# EAGLE board 2mos7 (EAGLE 5.10)
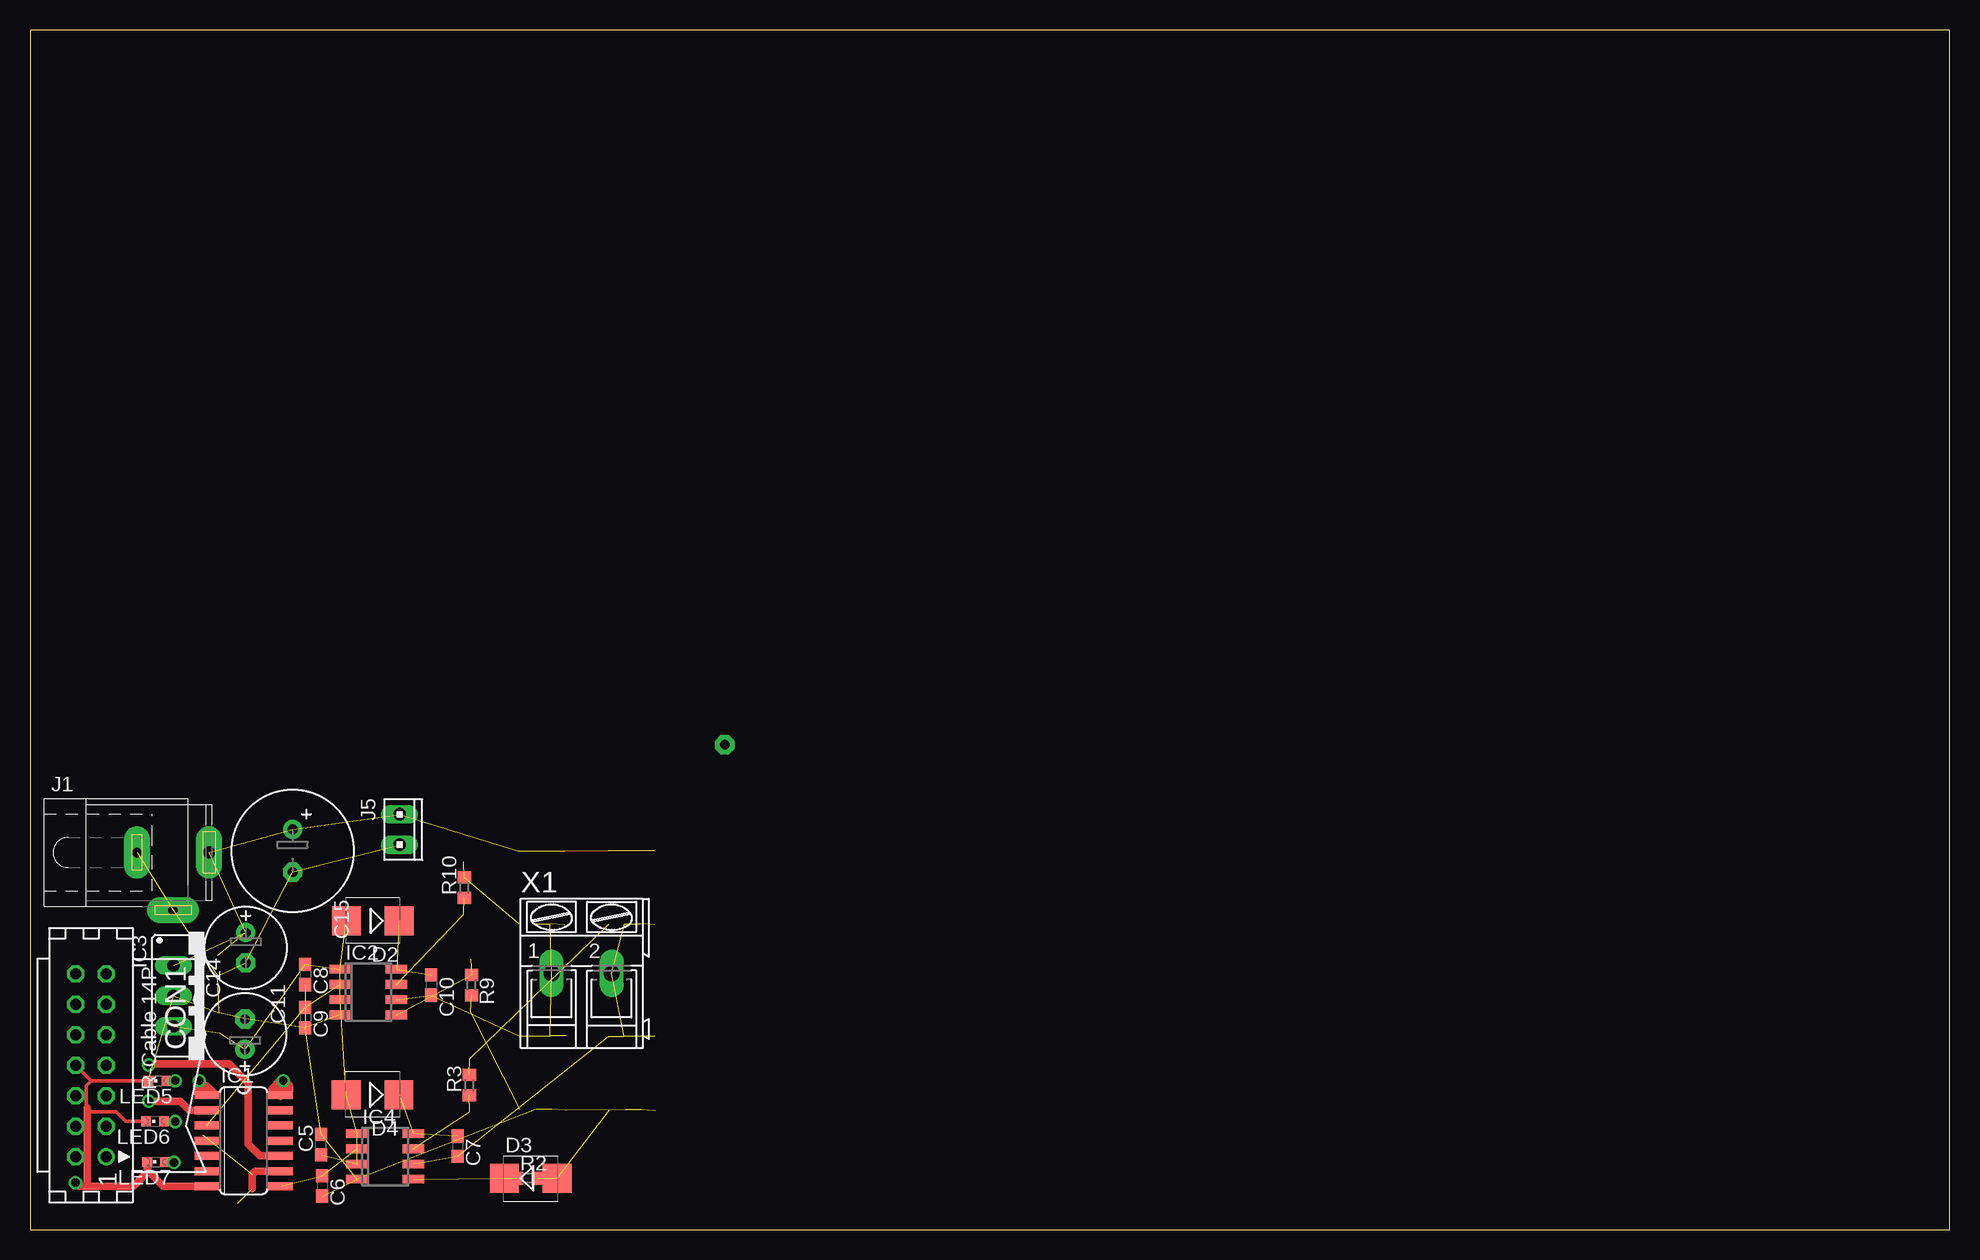
[diagram p0: board, top side]
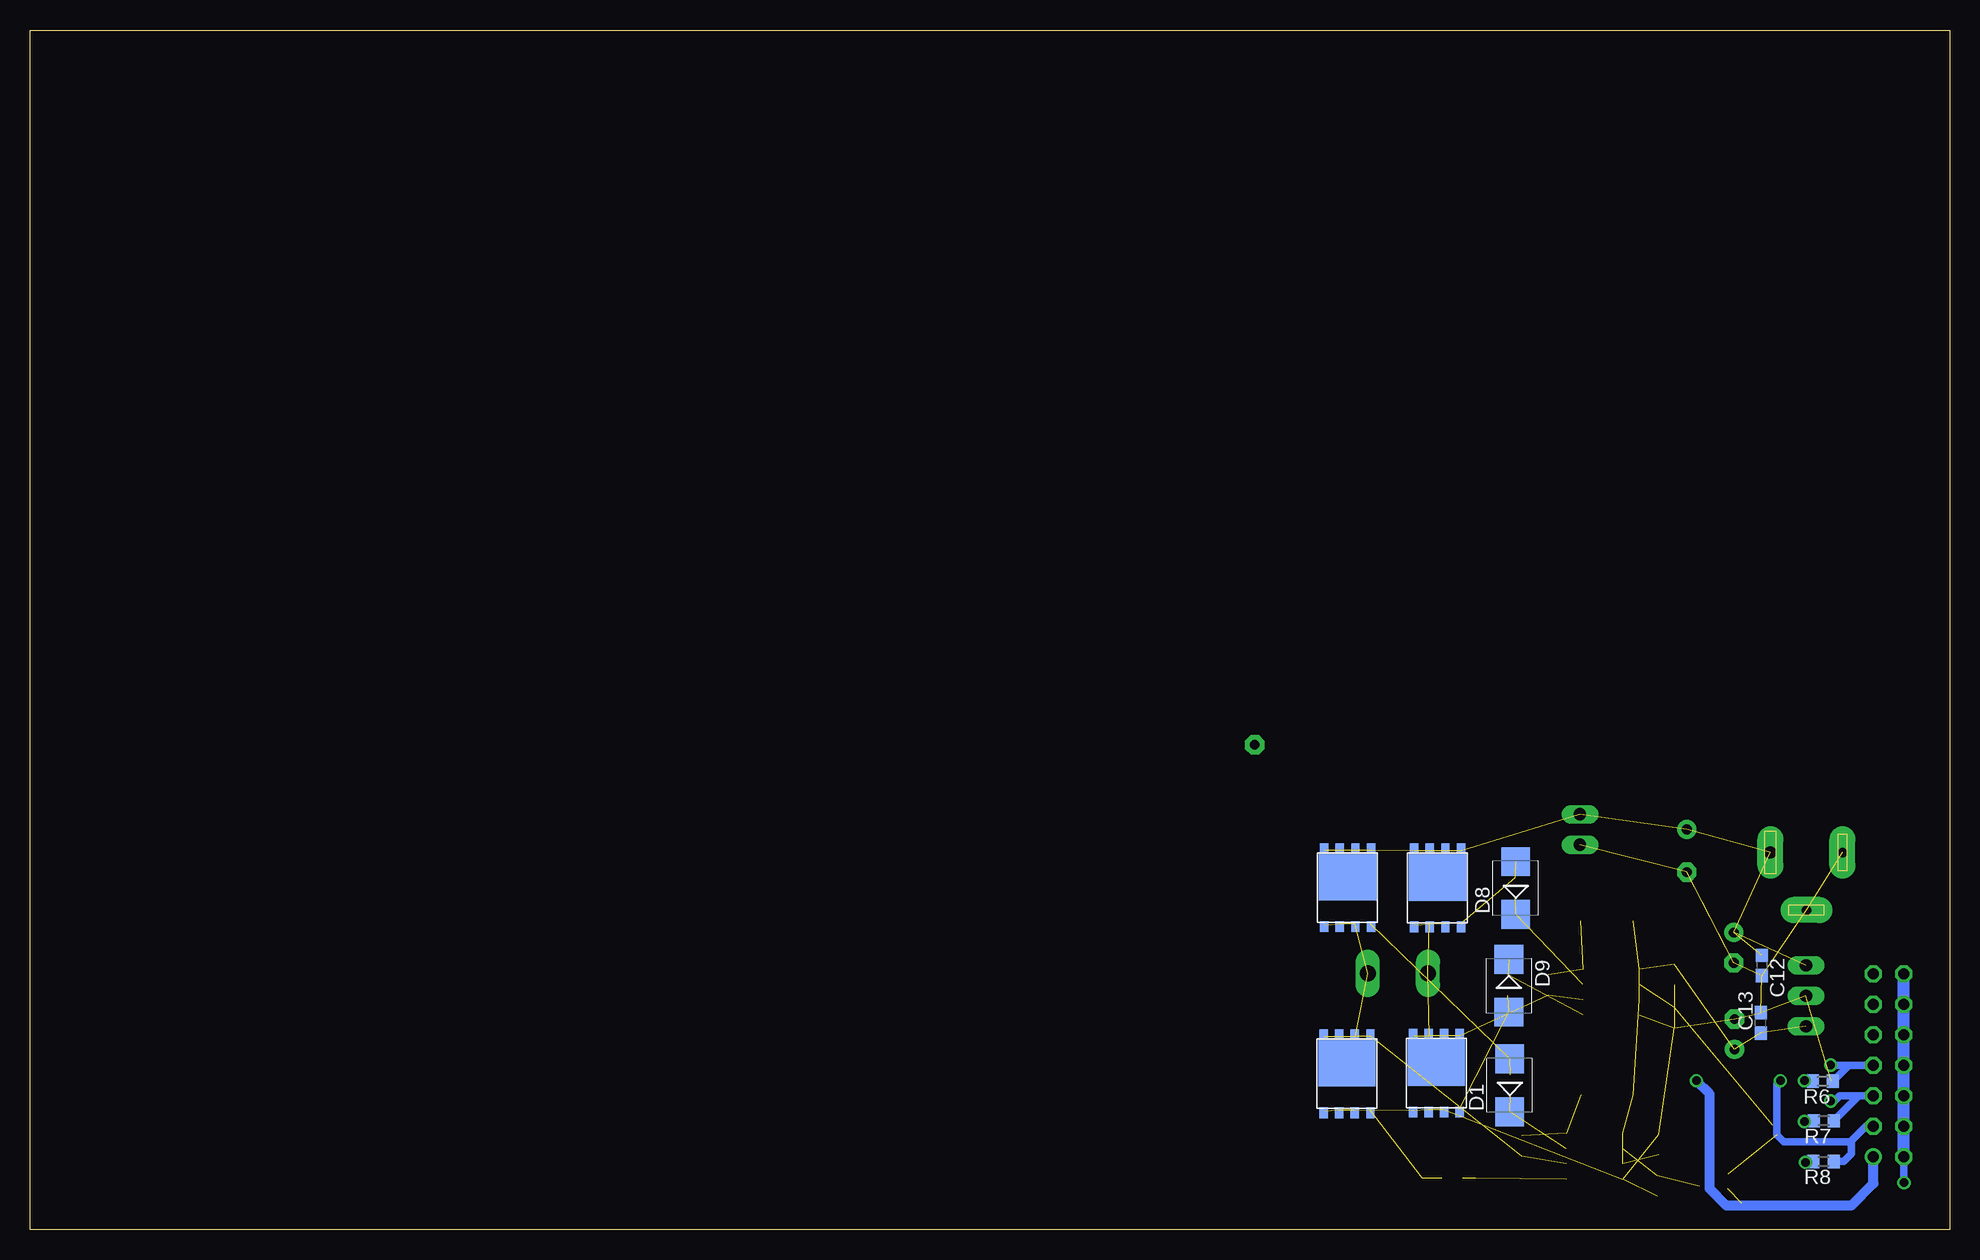
[diagram p1: board, bottom side, seen from below]

Size 160 x 100 mm. Coordinates in mm from the lower left corner, seen from the top.
Outline: 0,0 160,0 160,100 0,100 0,0
Copper layers (1*16): Top 0.035mm / dielectric 1.5mm / Bottom 0.035mm
Design rules "default": minimum track width 10mil, minimum drill 24mil, track to track 8mil, track to pad 8mil, pad to pad 8mil, via to via 8mil, smd to smd 8mil, copper to edge 40mil, drill to drill 8mil, minimum pad ring 10mil, minimum via ring 8mil, stop-mask expansion 4mil, vias tented up to drill 0mil, thermal gap 10mil

## Footprints (pad centres in the part's own frame; a part is rotated, then mirrored left to right if it is on the bottom)
C0603 = smd 1.1 x 1: 1 -0.85,0; 2 0.85,0
E2,5-7 = drill 0.813 pad 1.6 round: + -1.27,0 | drill 0.813 pad 1.6 octagon: - 1.27,0
E3,5-10 = drill 0.813 pad 1.6 round: + -1.778,0 | drill 0.813 pad 1.6 octagon: - 1.778,0
CON14L = drill 0.914 round: 1 7.62,1.27 | drill 0.914 octagon: 2 7.62,-1.27; 3 5.08,1.27; 4 5.08,-1.27; 5 2.54,1.27; 6 2.54,-1.27; 7 0,1.27; 8 0,-1.27; 9 -2.54,1.27; 10 -2.54,-1.27; 11 -5.08,1.27; 12 -5.08,-1.27; 13 -7.62,1.27; 14 -7.62,-1.27
SMB = smd 2.4 x 2.4: A 2.2,0; C -2.2,0
SO14 = smd 0.66 x 2.032: 1 -3.81,-3.073; 2 -2.54,-3.073; 3 -1.27,-3.073; 4 0,-3.073; 5 1.27,-3.073; 6 2.54,-3.073; 7 3.81,-3.073; 8 3.81,3.073; 9 2.54,3.073; 10 1.27,3.073; 11 0,3.073; 12 -1.27,3.073; 13 -2.54,3.073; 14 -3.81,3.073
SO08 = smd 0.72 x 1.78: 1 -1.905,-2.35; 2 -0.635,-2.35; 3 0.635,-2.35; 4 1.905,-2.35; 5 1.905,2.35; 6 0.635,2.35; 7 -0.635,2.35; 8 -1.905,2.35
78XXS = drill 1.016 long: GND 0,-2.54; IN -2.54,-2.54; OUT 2.54,-2.54
SPC4078 = drill 0.8 pad 2.184 long: 1 -3,0; 2 0,-4.8 | drill 1 pad 2.184 long: 3 3,0
10X02MTA = drill 1.016 long: 1 1.27,0; 2 -1.27,0
CHIPLED_0603 = smd 0.8 x 0.8: A 0,-0.75; C 0,0.75
1,6/0,8 = drill 0.813 pad 1.6 octagon: 1 0,0
R0603 = smd 1 x 1.1: 1 -0.85,0; 2 0.85,0
CDS = smd 0.406 x 0.203: D1 1,-0.9; D2 1,0.4; D3 1,1.7; D4 1,3; G 7.1,2.9; P$1 7.2,3.1; P$2 7.2,2.9; P$3 7.2,2.7; P$4 7.5,1.9; P$5 7.6,3.1; P$6 7.6,2.9; P$7 7.6,2.7; P$8 7.6,1.9; P$9 7.1,3.1; P$11 7.1,2.7; P$12 7.5,1.7; P$13 7.2,-1.1; P$14 7.6,-1.1; P$16 7.6,-0.9; P$17 7.1,-0.9; P$18 7.1,-1.1; P$19 7.1,-0.7; P$20 7.5,-0.7; P$21 7.6,-0.7; P$22 7.1,-1.2; P$23 7.5,-1.2; P$24 7.6,-1.2; P$25 7.1,3.2; P$26 7.5,3.2; P$27 7.6,3.2; P$28 7.1,0.1; P$30 7.1,0.5; P$31 7.1,0.6; P$32 7.1,1.4; P$34 7.1,1.8; P$35 7.1,1.9; P$36 7.6,1.7; P$37 7.5,1.5; P$38 7.6,1.5; P$39 7.5,1.4; P$40 7.6,1.4; P$41 7.5,0.6; P$42 7.6,0.6; P$43 7.5,0.4; P$44 7.6,0.4; P$45 7.5,0.2; P$46 7.6,0.2; P$47 7.5,0.1; P$48 7.6,0.1; P$68 1,3.2; P$69 0.6,3.2; P$70 0.6,3; P$72 1.1,3.2; P$73 1.2,3; P$74 0.6,2.8; P$75 1,2.8; P$76 1.1,2.8; P$77 0.6,2.7; P$78 1,2.7; P$79 1.1,2.7; P$80 1.1,1.9; P$81 0.7,1.9; P$82 0.6,1.9; P$83 0.6,1.7; P$85 1.1,1.7; P$86 0.6,1.5; P$87 1,1.5; P$88 1.2,1.5; P$89 0.6,1.4; P$90 1,1.4; P$91 1.2,1.4; P$92 0.6,0.6; P$93 1,0.6; P$94 1.1,0.6; P$95 0.6,0.4; P$97 1.2,0.4; P$98 0.6,0.2; P$99 1,0.2; P$100 1.2,0.2; P$101 0.6,0.1; P$102 1,0.1; P$103 1.1,0.1; P$104 0.6,-0.7; P$105 0.9,-0.7; P$106 1.1,-0.7; P$107 0.6,-0.9; P$109 1.1,-0.9; P$110 0.6,-1.1; P$111 1.1,-1.1; P$112 1,-1.1; P$113 0.6,-1.2; P$114 1,-1.2; P$115 1.1,-1.2; S1 7.2,-0.9; S2 7.1,0.3; S3 7.1,1.6 | smd 1.93 x 0.965: P$49 4.2,-0.9; P$50 2.3,-0.9; P$51 2.3,0; P$52 4.2,0; P$53 4.2,0.9; P$54 2.3,0.9; P$55 4.2,1.8; P$56 2.3,1.8; P$57 2.3,2.7; P$58 4.2,2.7; P$59 4.2,2.9; P$60 2.3,2.9; P$61 2.2,2.9; P$62 2.2,1.9; P$63 2.2,2; P$64 2.2,1; P$65 2.2,0; P$66 2.2,0.1; P$67 2.2,-0.9
AK300/2 = drill 1.321 long: 1 -2.515,0; 2 2.489,0

## Placement (x,y rotation side)
C5  10 uf  [C0603]  24.25,7.09 90 top
C6  .01 uf  [C0603]  24.35,3.64 270 top
C7  1uf  [C0603]  35.65,6.95 270 top
C8  10 uf  [C0603]  22.95,21.26 270 top
C9  .01 uf  [C0603]  22.95,17.66 270 top
C10  1uf  [C0603]  33.45,20.39 270 top
C11  100uf  [E2,5-7]  17.98,23.49 270 top
C12  .33uf  [C0603]  15.65,22.01 270 bottom
C13  .1uf  [C0603]  15.75,17.23 90 bottom
C14  47uf  [E2,5-7]  17.92,16.28 90 top
C15  [E3,5-10]  21.89,31.57 270 top
CON1  [CON14L]  5.08,13.69 270 top
D1  1N5819  [SMB]  36.66,12.02 90 bottom
D2  1N5819  [SMB]  28.57,25.74 180 top
D3  1N5819  [SMB]  41.74,4.26 0 top
D4  1N5819  [SMB]  28.55,11.24 180 top
D8  1N5819  [SMB]  36.16,28.46 90 bottom
D9  1N5819  [SMB]  36.74,20.33 270 bottom
IC1  74ACT00D  [SO14]  17.8,7.4 270 top
IC2  IR2520DS  [SO08]  28.2,19.8 270 top
IC3  7818  [78XXS]  14.5,19.49 270 top
IC4  IR2520DS  [SO08]  29.6,6.1 270 top
J1  [SPC4078]  11.92,31.43 0 top
J5  [10X02MTA]  30.8,33.35 270 top
LED5  [CHIPLED_0603]  10.62,12.4 90 top
LED6  [CHIPLED_0603]  10.42,9.02 90 top
LED7  [CHIPLED_0603]  10.52,5.64 90 top
PAD31  [1,6/0,8]  57.91,40.41 0 top
R2  15ohm  [R0603]  41.45,4.28 0 top
R3  15ohm  [R0603]  36.62,12.03 90 top
R6  [R0603]  10.56,12.37 180 bottom
R7  [R0603]  10.48,9.07 180 bottom
R8  [R0603]  10.5,5.67 180 bottom
R9  15ohm  [R0603]  36.8,20.38 270 top
R10  15ohm  [R0603]  36.2,28.5 90 top
U$1  CSD18503GDS-NEW  [CDS]  43.67,32.58 270 bottom
U$2  CSD18503GDS-NEW  [CDS]  43.77,17.14 270 bottom
U$3  CSD18503GDS-NEW  [CDS]  51.17,32.6 270 bottom
U$4  CSD18503GDS-NEW  [CDS]  51.22,17.09 270 bottom
X1  [AK300/2]  45.99,21.35 0 top

## Library data of the parts
C5-C10 C12 C13 C15 R2 R3 R6-R10 = rcl
C11 C14 = resistor
CON1 = con-harting
D1-D4 D8 D9 = diode
IC1 = 74xx-eu
IC2 IC4 = ir
IC3 = v-reg
J1 = con-jack
J5 = con-amp
LED5-LED7 = led
PAD31 = hole00
U$1-U$4 = cds_new
X1 = con-ptr500

## Nets
5VCC: CON1.1 IC1.14
18V1: C5.1 C8.1 C13.1 C14.+ D2.A D4.A IC2.1 IC2.3 IC3.OUT IC4.1 IC4.3
24V1: C11.+ C12.1 C15.+ IC3.IN J1.3 J5.2 U$1.D1 U$1.D2 U$1.D3 U$1.D4 U$3.D1 U$3.D2 U$3.D3 U$3.D4
B1: CON1.7 IC1.10 R6.1
D1: CON1.5 IC1.2 R7.1
GND: C5.2 C6.2 C8.2 C9.2 C11.- C12.2 C13.2 C14.- C15.- CON1.2 CON1.4 CON1.6 CON1.8 CON1.10 CON1.12 CON1.14 IC1.7 IC2.4 IC3.GND IC4.4 J1.1 J1.2 J5.1 LED5.C LED6.C LED7.C U$2.S1 U$2.S2 U$2.S3 U$4.S1 U$4.S2 U$4.S3
IN1: C9.1 IC1.3 IC2.2
IN2: C6.1 IC1.8 IC4.2
N$2: D3.C IC4.5 R2.1
N$4: C7.2 IC4.6 U$3.S1 U$3.S2 U$3.S3 U$4.D1 U$4.D2 U$4.D3 U$4.D4 X1.2
N$6: IC1.4
N$7: IC1.5
N$8: IC1.6
N$12: D8.A R10.2 U$1.G
N$13: D1.C IC4.7 R3.1
N$14: D1.A R3.2 U$3.G
N$15: D3.A R2.2 U$4.G
N$16: IC1.12
N$17: C10.2 IC2.6 U$1.S1 U$1.S2 U$1.S3 U$2.D1 U$2.D2 U$2.D3 U$2.D4 X1.1
N$18: IC1.13
N$19: IC1.11
N$23: D9.C IC2.5 R9.1
N$24: D9.A R9.2 U$2.G
N$25: D8.C IC2.7 R10.1
N$33: LED5.A R6.2
N$34: LED6.A R7.2
N$35: LED7.A R8.2
P1: CON1.3 IC1.1 IC1.9 R8.1
VB1: C10.1 D2.C IC2.8
VB2: C7.1 D4.C IC4.8

## Tracks (layer width: path | path; a pad name or v marks a point on that pad's centre or on a via)
5VCC  (via drill 0.7)
  Top 0.813: v21.1,12.4 21.5,12 21.5,11.5 21.3,11.5 21.2,11.6 21.2,12.1 21,12.3 20.9,12.3 20.3,11.7 20.38,11.7 IC1.14
  Bottom 0.813: CON1.1 6.35,3.85 8.2,2 18.6,2 20,3.4 20,11.3 v21.1,12.4
18V1  (10 unrouted)
24V1  (13 unrouted)
B1  (via drill 0.7)
  Top 0.61: IC1.10 19.17,6.13 18.2,7.1 18.2,12.2 16.6,13.8 10,13.8 v9.9,13.7
  Bottom 0.61: R6.1 8.39,13.69 CON1.7 v9.9,13.7
D1  (via drill 0.7)
  Top 0.61: IC1.2 13.26,9.94 12.5,10.7 v9.9,10.7
  Bottom 0.61: 7.55,11.15 7.2,11.15 CON1.5 | R7.1 7.55,11.15 | v9.9,10.7 9.6,10.7 9.15,11.15 7.55,11.15
GND  (via drill 0.7)  (21 unrouted)
  Top 0.305: 5.1,12.4 LED5.C | CON1.8 5.1,12.4 | 5.1,12.4 4.7,12 4.7,10.2 4.75,10.15 5.1,9.8 7.2,9.8 7.98,9.02 LED6.C
  Top 0.61: IC1.7 11.11,3.59 9.8,4.9 9.8,5.61 LED7.C 9.77,4.77 8.6,3.6 4.3,3.6 4,3.9 v3.8,3.9 4.1,3.6 | 4.75,10.15 4.75,3.95
  Bottom 0.61: v3.8,3.9 CON1.2
  Bottom 1.016: CON1.2 CON1.4 CON1.6 CON1.8 CON1.10 CON1.12 CON1.14
IN1  (2 unrouted)
IN2  (2 unrouted)
N$2  (2 unrouted)
N$4  (9 unrouted)
N$12  (2 unrouted)
N$13  (2 unrouted)
N$14  (2 unrouted)
N$15  (2 unrouted)
N$17  (9 unrouted)
N$23  (2 unrouted)
N$24  (2 unrouted)
N$25  (2 unrouted)
N$33  (via drill 0.7)
  Top 0.61: v12.1,12.4 LED5.A
  Bottom 0.61: R6.2 12.07,12.37 v12.1,12.4
N$34  (via drill 0.7)
  Top 0.61: v12.1,9 11.19,9 LED6.A
  Bottom 0.61: R7.2 12.03,9.07 v12.1,9
N$35  (via drill 0.7)
  Top 0.61: LED7.A 11.31,5.6 v12,5.6
  Bottom 0.61: v12,5.6 11.93,5.67 R8.2
P1  (via drill 0.7)  (2 unrouted)
  Top 0.61: v14.1,12.4 14.4,12.1 14,12.1 13.9,12.2 13.9,11.4 14.1,11.2 14.1,11.7 14.2,11.8 14.3,11.8 14.5,12 14.7,12 15.1,11.6 | IC1.1 14.73,11.27 14.4,11.6 15.1,11.6 | 15.1,11.6 15.3,11.4 | IC1.9 18.76,4.86 18.5,4.6 18.5,3.4
  Bottom 0.61: CON1.3 6.99,8.61 8.2,7.4 | 8.2,7.4 8.2,6.3 8.8,5.7 9.62,5.7 R8.1 | v14.1,12.4 14.4,12.1 14.4,7.9 13.8,7.3 8.3,7.3 8.2,7.4
VB1  (2 unrouted)
VB2  (2 unrouted)